# EAGLE board lcdmount (EAGLE 6.0)
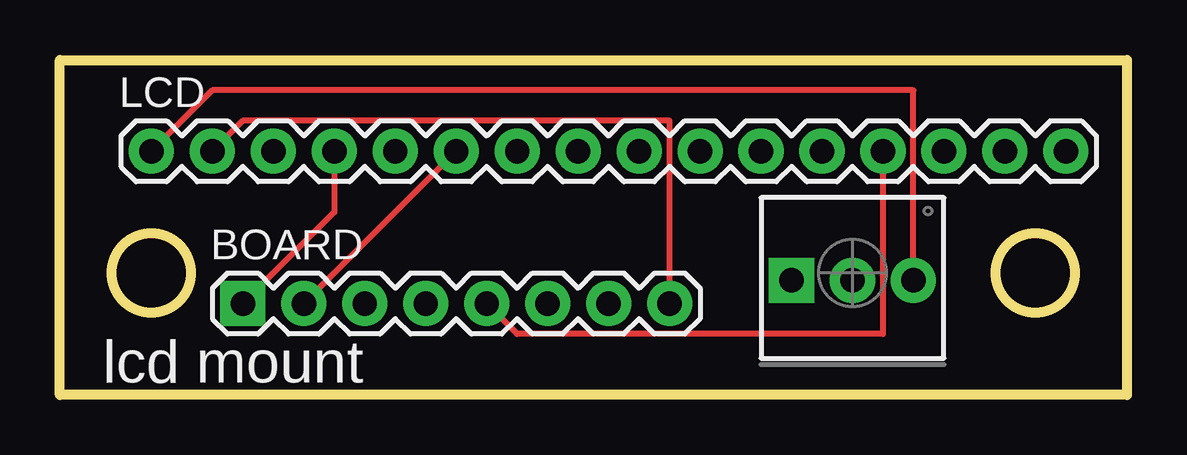
[diagram p0: board, top side]
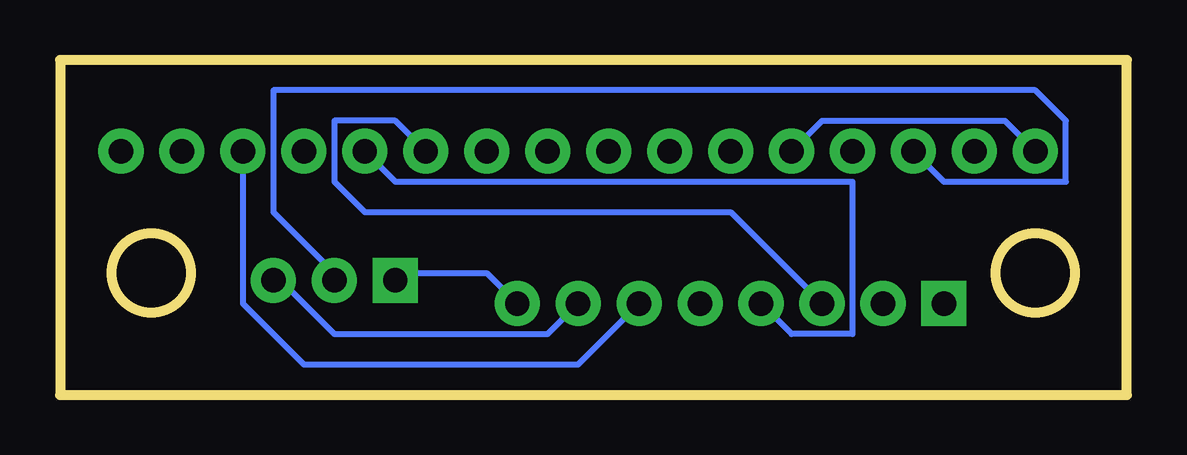
[diagram p1: board, bottom side, seen from below]

Size 44.45 x 13.97 mm. Coordinates in mm from the lower left corner, seen from the top.
Outline: 0,13.97 44.45,13.97 44.45,0 0,0 0,13.97
Outline: circle at 40.64,5.08 radius 1.65
Outline: circle at 3.81,5.08 radius 1.65
Copper layers (1*16): Top 0.035mm / dielectric 1.5mm / Bottom 0.035mm
Design rules: minimum track width 10mil, minimum drill 24mil, track to track 8mil, track to pad 8mil, pad to pad 8mil, via to via 8mil, smd to smd 8mil, copper to edge 40mil, drill to drill 8mil, minimum pad ring 10mil, minimum via ring 8mil, stop-mask expansion 4mil, vias tented up to drill 0mil, thermal gap 10mil

## Footprints (pad centres in the part's own frame; a part is rotated, then mirrored left to right if it is on the bottom)
1X08 = drill 1.016 pad 1.88 square: 1 0,0 | drill 1.016 pad 1.88: 2 2.54,0; 3 5.08,0; 4 7.62,0; 5 10.16,0; 6 12.7,0; 7 15.24,0; 8 17.78,0
1X16 = drill 1.016 pad 1.88: 1 0,0; 2 2.54,0; 3 5.08,0; 4 7.62,0; 5 10.16,0; 6 12.7,0; 7 15.24,0; 8 17.78,0; 9 20.32,0; 10 22.86,0; 11 25.4,0; 12 27.94,0; 13 30.48,0; 14 33.02,0; 15 35.56,0; 16 38.1,0
3362U-2 = drill 1.016 pad 1.88 square: 1 -2.54,-0.305 | drill 1.016 pad 1.88: 2 0,-0.305; 3 2.54,-0.305

## Placement (x,y rotation side)
BOARD  [1X08]  7.62,3.81 0 top
LCD  [1X16]  3.81,10.16 0 top
R1  TRIMPOT  [3362U-2]  33.02,5.08 0 top

## Library data of the parts
BOARD R1 = SparkFun
LCD = SparkFun-Connectors

## Nets
N$1: BOARD.7 LCD.1 LCD.5 R1.3
N$2: BOARD.8 LCD.2 R1.1
N$3: LCD.3 R1.2
N$4: BOARD.1 LCD.4
N$5: BOARD.3 LCD.11
N$6: BOARD.2 LCD.6
N$7: BOARD.4 LCD.12
N$8: BOARD.5 LCD.13
N$9: BOARD.6 LCD.14

## Tracks (layer width: path | path; a pad name or v marks a point on that pad's centre or on a via)
N$1
  Top 0.254: LCD.1 6.35,12.7 35.56,12.7 R1.3
  Bottom 0.254: LCD.1 5.08,11.43 12.7,11.43 LCD.5 | BOARD.7 24.13,2.54 33.02,2.54 35.56,5.08 R1.3
N$2
  Top 0.254: LCD.2 7.62,11.43 25.4,11.43 BOARD.8
  Bottom 0.254: BOARD.8 26.67,5.08 30.48,5.08 R1.1
N$3
  Bottom 0.254: LCD.3 7.62,8.89 2.54,8.89 2.54,11.43 3.81,12.7 35.56,12.7 35.56,7.62 33.02,5.08 R1.2
N$4
  Top 0.254: BOARD.1 11.43,7.62 LCD.4
N$5
  Bottom 0.254: BOARD.3 16.51,7.62 31.75,7.62 33.02,8.89 33.02,11.43 30.48,11.43 LCD.11
N$6
  Top 0.254: LCD.6 BOARD.2
N$7
  Bottom 0.254: BOARD.4 13.97,2.54 11.43,2.54 11.43,8.89 30.48,8.89 LCD.12
N$8
  Top 0.254: BOARD.5 19.05,2.54 34.29,2.54 LCD.13
N$9
  Bottom 0.254: BOARD.6 22.86,1.27 34.29,1.27 36.83,3.81 LCD.14

## Text on the board
tPlace: lcd mount